# Altium PCB PCB1.PcbDoc
Units mm, origin at the board's own origin, x right, y up, seen from the top; angles counter-clockwise.
Board outline 76.58 x 73.41 mm, 2 copper layers (Top Layer, Bottom Layer), stack 1.471 mm thick; 10 components, 18 nets, 68 pads, 8 vias.
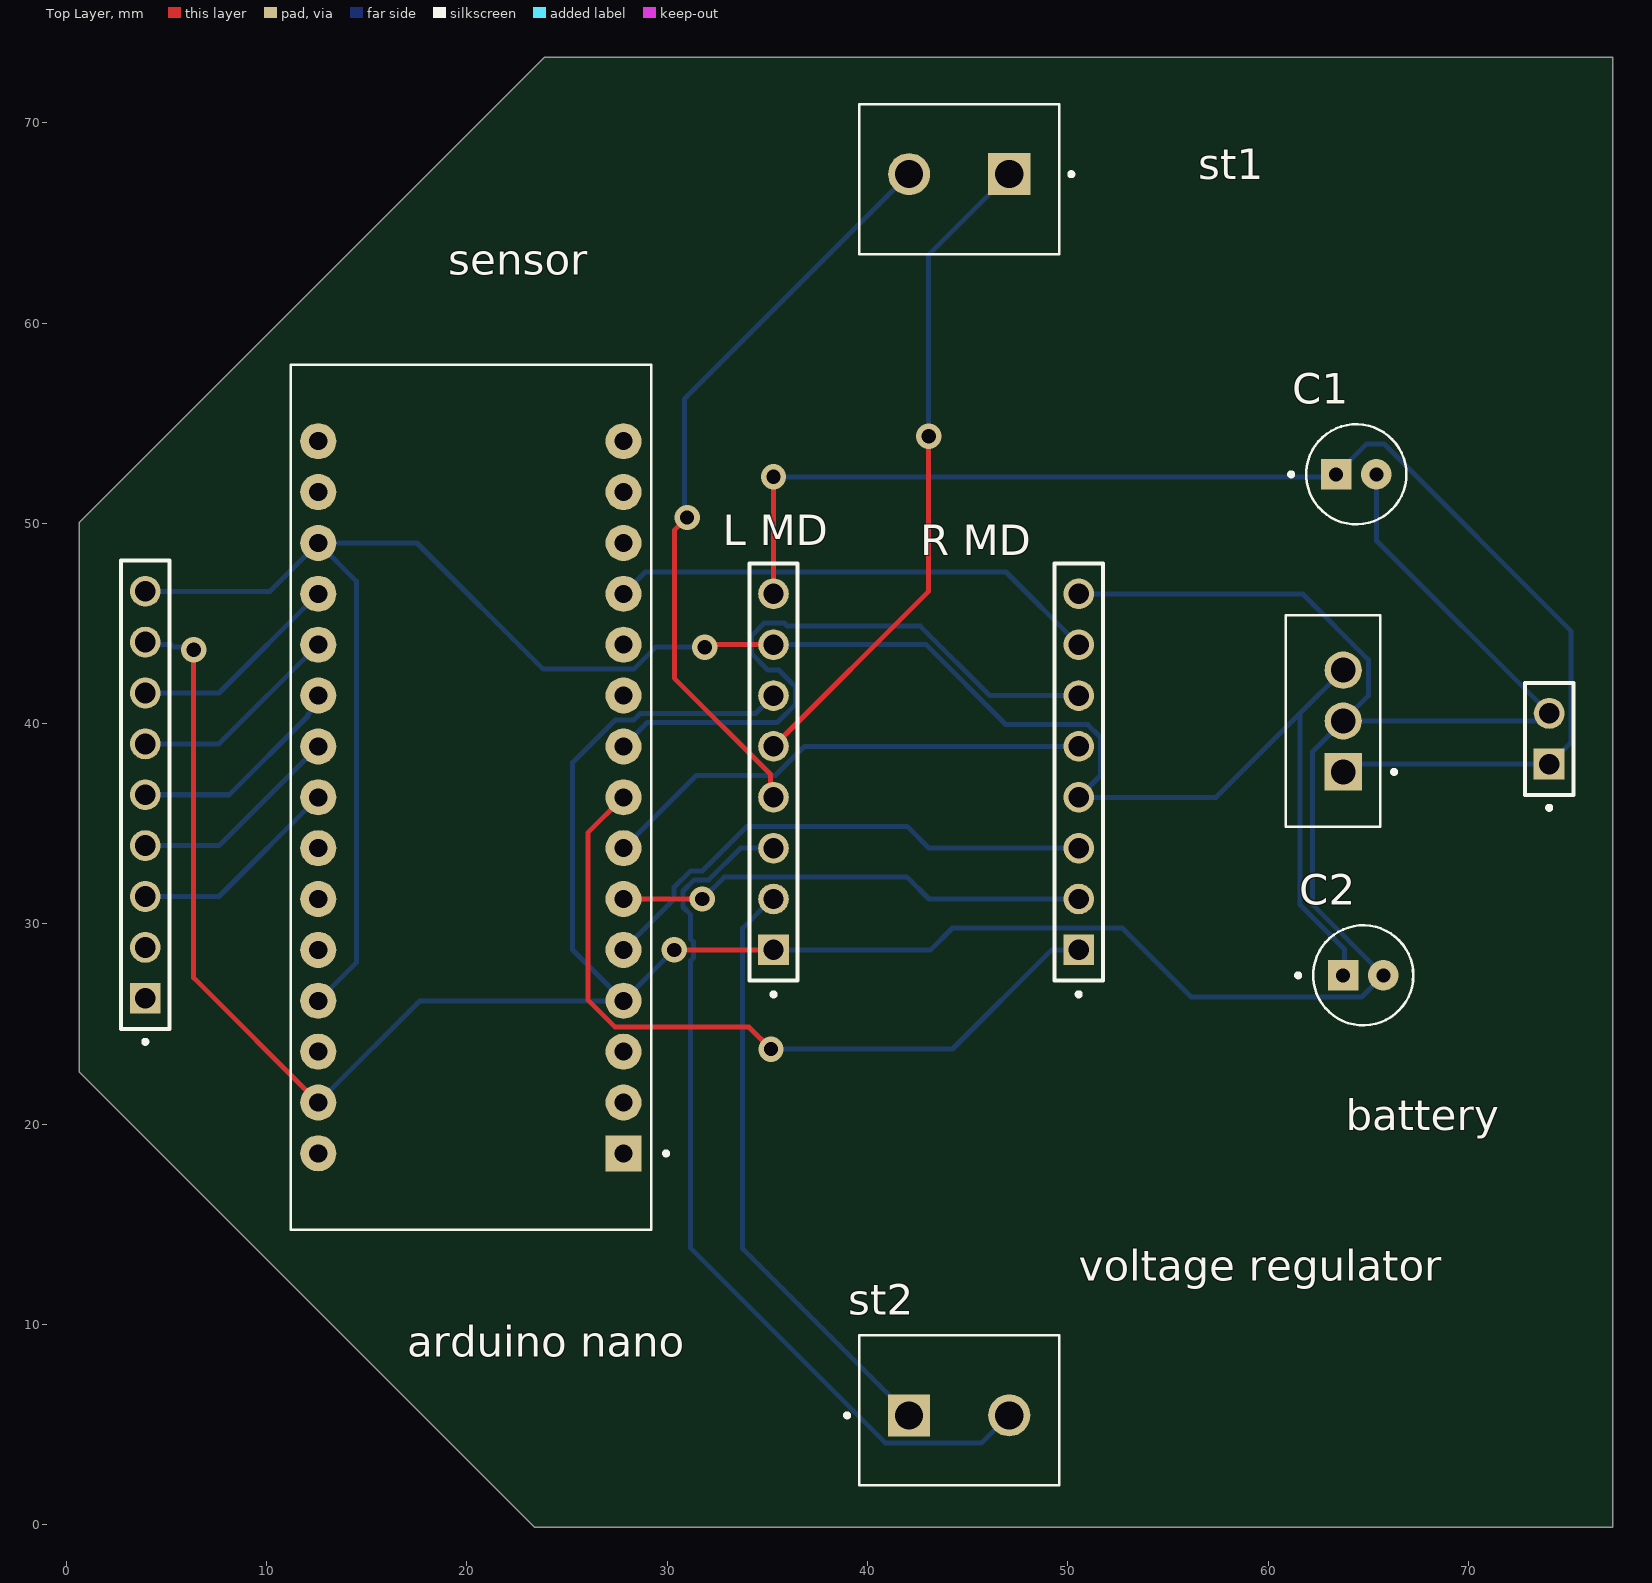
[diagram p0: Top Layer view]
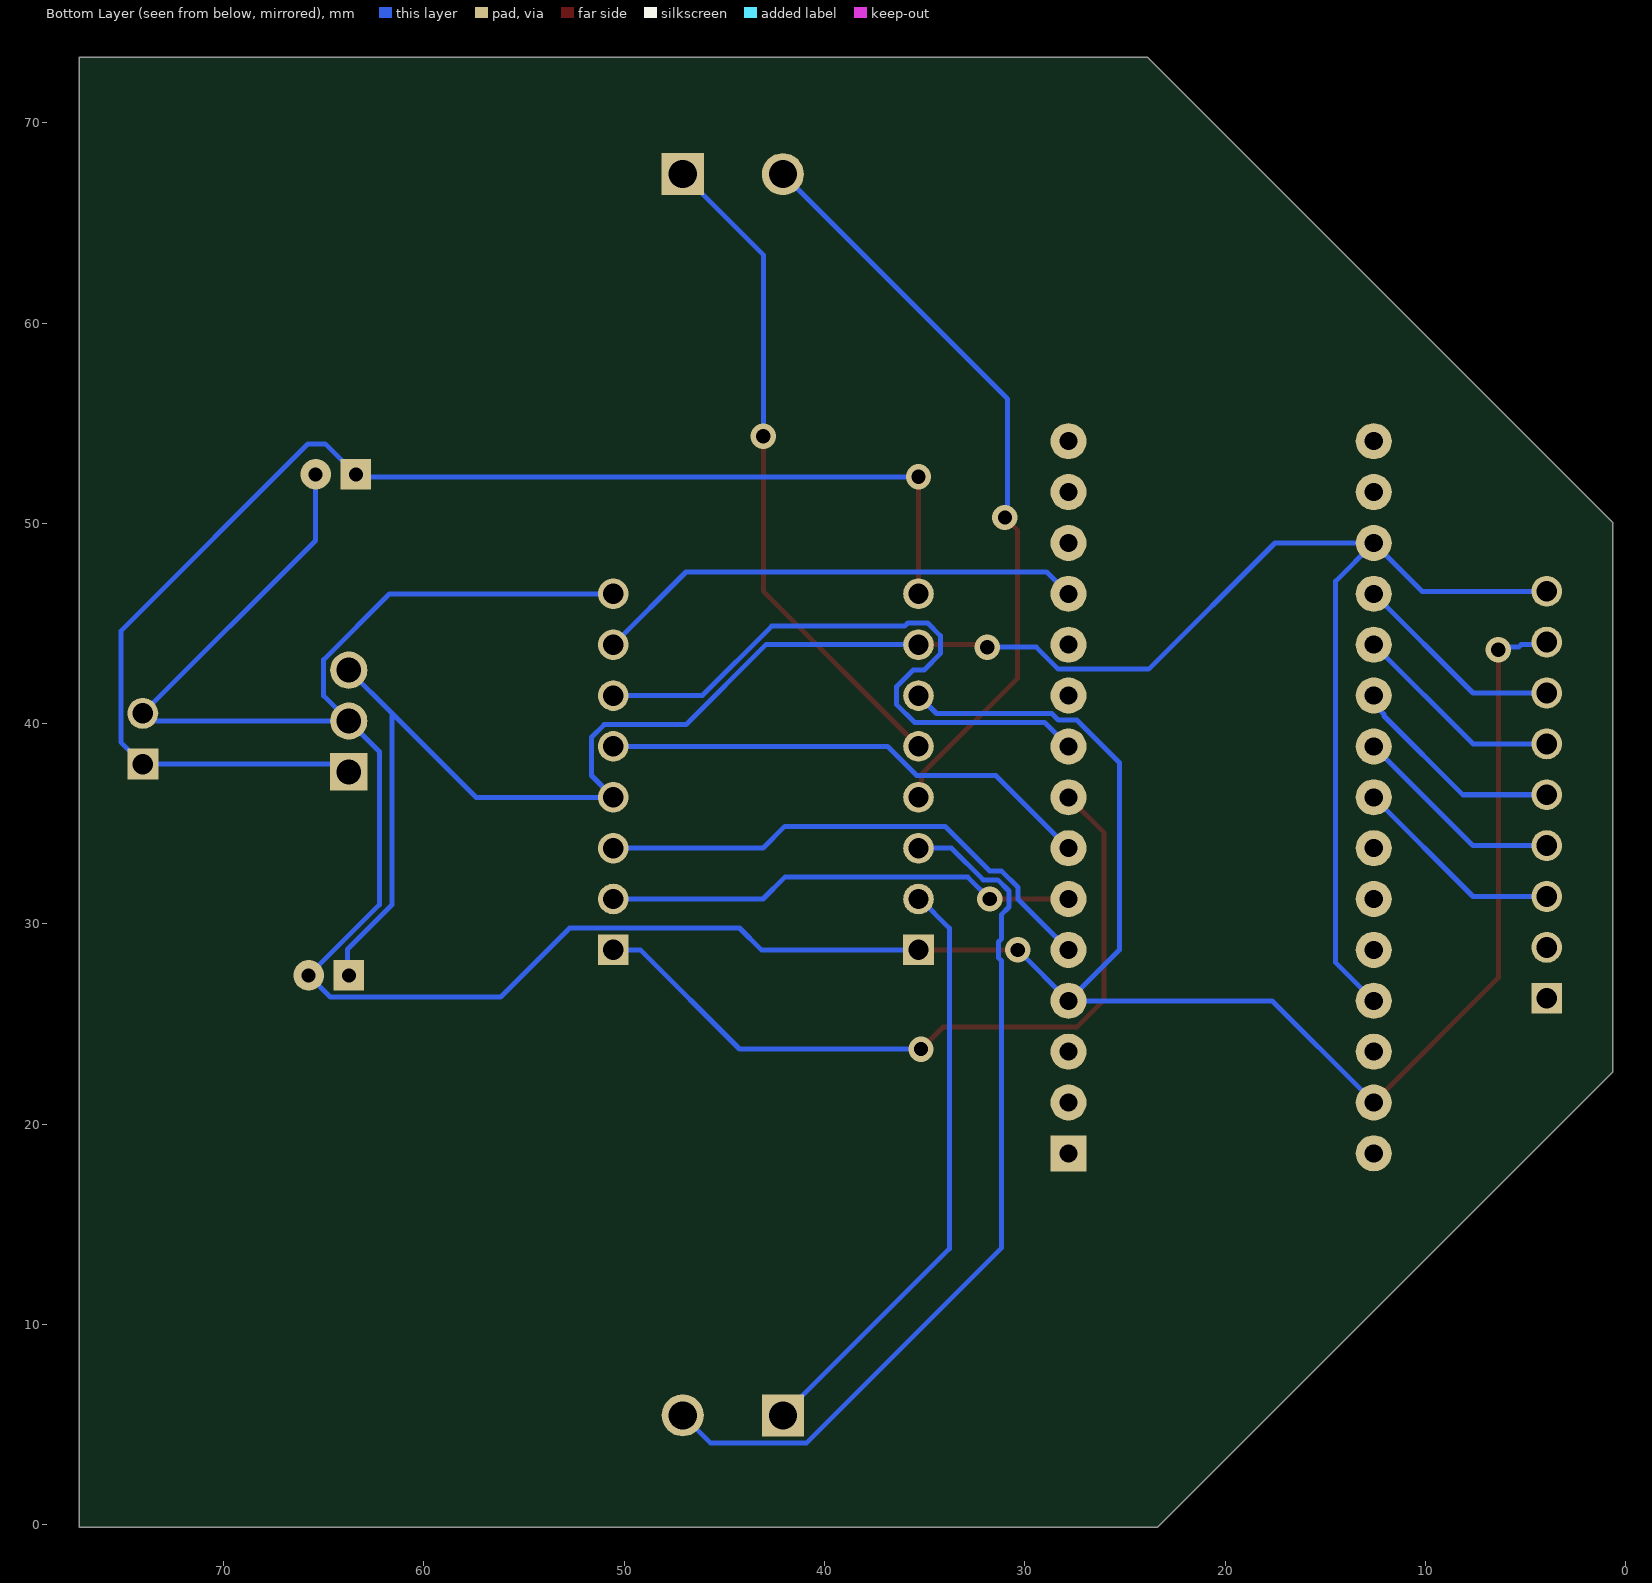
[diagram p1: Bottom Layer view, seen from below]
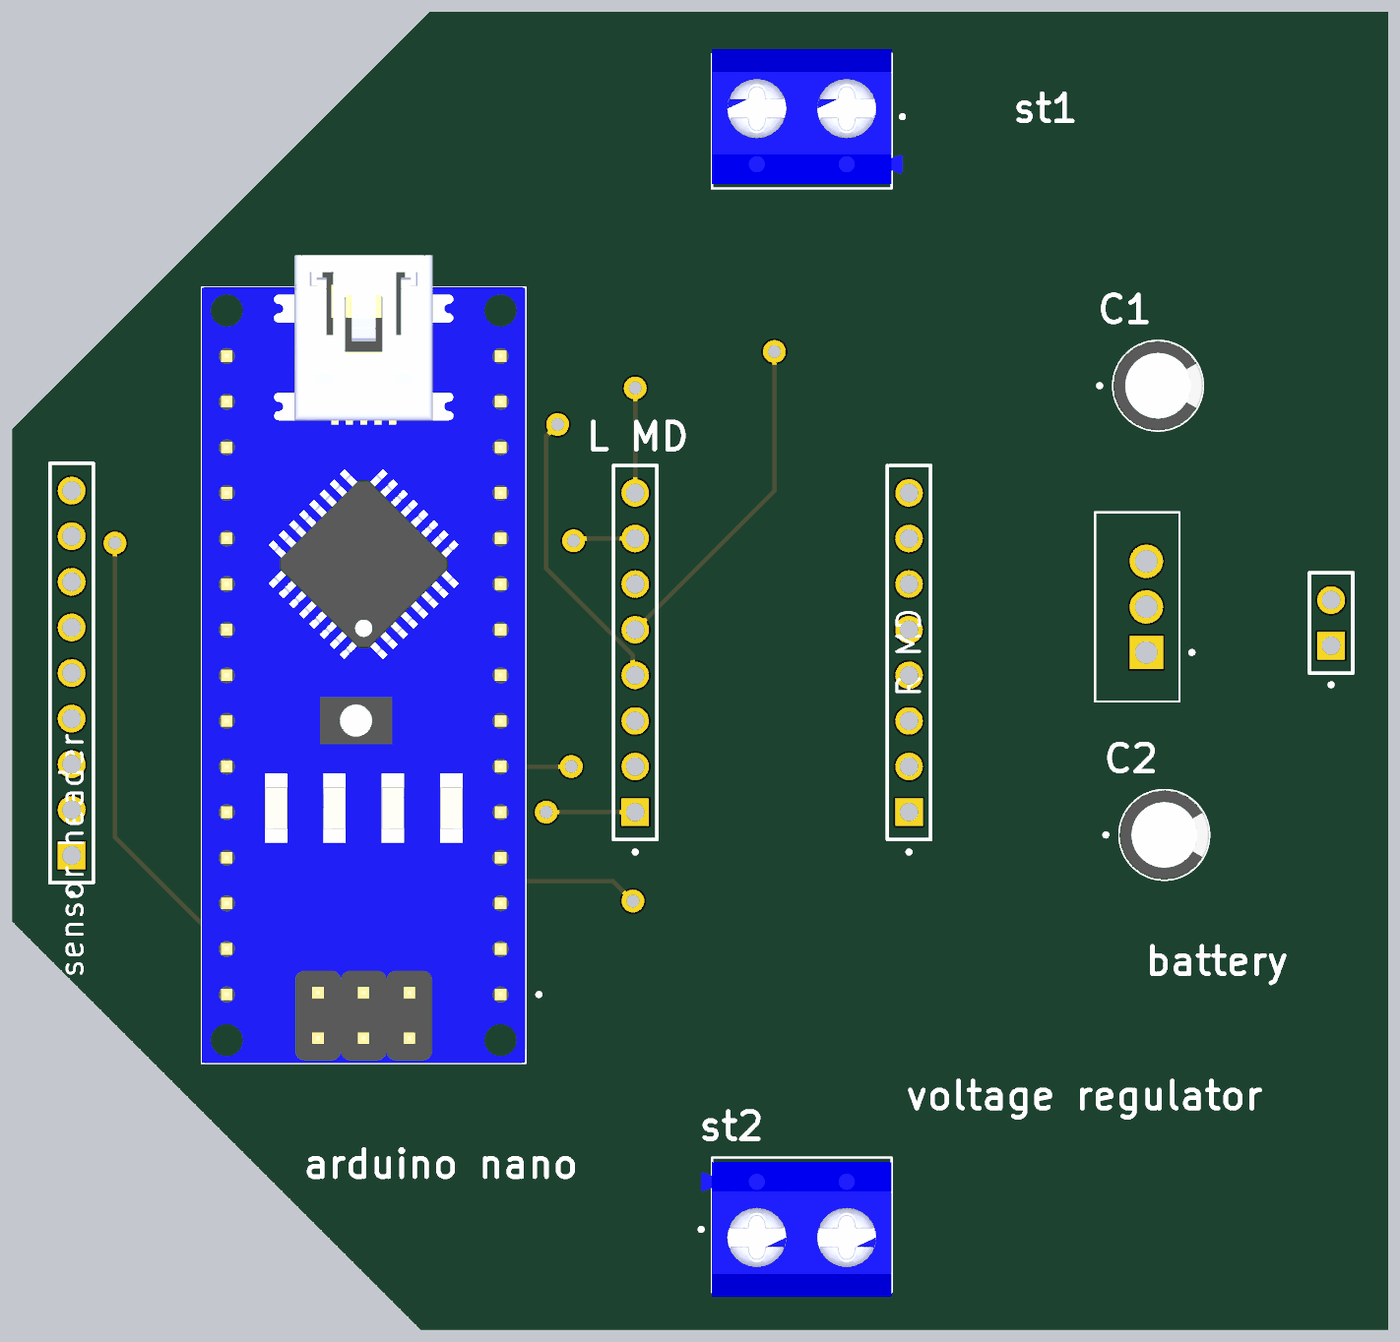
[diagram p2: 3D render of the assembled board from above, using the file's embedded part models]

## Layer stack, top to bottom
Top Solder: solder mask 0.0102, Solder Resist, Dk 3.5
Top Layer: signal copper 0.0356
Dielectric 1: dielectric 1.4, FR-4, Dk 4.8
Bottom Layer: signal copper 0.0356
Bottom Solder: solder mask 0.0102, Solder Resist, Dk 3.5

## Board outline
23.368,-0.127 77.216,-0.127 77.216,73.279 23.876,73.279 0.635,50.038 0.635,22.606

## Design rules (kind name [scope] priority, off if disabled: settings)
BoardOutlineClearance [All] p1: gap=1 ignorepadtopadclearanceinfootprint=FALSE
Clearance [All] p1: gap=0.2 ignorepadtopadclearanceinfootprint=FALSE
HoleSize [All] p1: absolutevalues=TRUE maxlimit=4 minlimit=0.2 maxpercent=80.000 minpercent=20.000
HoleToHoleClearance [All] p1: gap=0.5 allowstackedmicrovias=TRUE
MinimumAnnularRing [All] p1: minimumring=0.2
MinimumSolderMaskSliver [All] p1: minsoldermaskwidth=0.5
PolygonConnect [All] p1: connectstyle=Relief reliefconductorwidth=0.254 reliefentries=4 polygonreliefangle="90 Angle" airgapwidth=0.254
RoutingVias [All] p1: holewidth=0.711 width=1.27 viastyle="Through Hole" minholewidth=0.711 minwidth=1.27 maxholewidth=0.711 maxwidth=1.27
SolderMaskExpansion [All] p1: expansion=0.102 istentingtop=FALSE
SupplyNets "Schematic Supply Nets_2" [InNet('+5V')] p1: voltage=0.000
SupplyNets "Schematic Supply Nets_1" [InNet('VCC')] p2: voltage=0.000
SupplyNets "Schematic Supply Nets" [InNet('GND')] p3: voltage=0.000
Width [All] p1: maxlimit=0.5 minlimit=0.2 preferedwidth=0.25
27 further rules are at their usual default settings.

## Components (designator, comment, footprint, x,y, rotation, side; value= is the part's Value field where it differs from the comment)
"arduino nano" "ARDUINO_NANO" MODULE_ARDUINO_NANO 20.193,36.322 r180 top
battery "SSQ-102-03-F-S" new-SAMTEC_SSQ-102-03-F-S 74.041,39.243 r90 top
C1 "ECEA1HKS4R7" new-CAPPRD200W45D500H500 64.405,52.451 r0 top value="100 nF"
C2 "ECEA1HKS4R7" new-CAPPRD200W45D500H500 64.754,27.432 r0 top value=100nF
"L MD" "SSQ-108-X-X-S" SAMTEC_SSQ-108-X-X-S 35.306,37.592 r90 top
"R MD" "SSQ-108-X-X-S" SAMTEC_SSQ-108-X-X-S 50.546,37.592 r90 top
sensor "SSW-109-06-G-S" SAMTEC_SSW-109-06-G-S-new 3.937,26.289 r90 top (schematic designator "sensor header")
st1 "N20_DC MOTOR N" HANDSON_KF301-2P 44.577,67.437 r180 top (schematic designator "screw terminal 1")
st2 "N20_DC MOTOR N" HANDSON_KF301-2P 44.577,5.461 r0 top (schematic designator "screw terminal 2")
"voltage regulator" "LM7805CTG" TO254P1054X470X1955-3 63.754,40.132 r90 top

## Footprints (in the part's own frame and the unit in brackets; to place one, negate y for a bottom-side part, rotate by r counter-clockwise, add the part's x,y. Pads: shape width x height; smd on the part's side, far side on the other; paste and mask are expansions set on the pad)
HANDSON_KF301-2P [mm]
  rect 2.1x2.1 / inner round 2.1 / far side rect 2.1x2.1 hole 1.4: 1(-2.5,0)
  round 2.1 hole 1.4: 2(2.5,0)
  silkscreen extent -5.7,-3.5 5,4, body extent -5.6,-3.75 5,3.75, height 10
MODULE_ARDUINO_NANO [mm]
  rect 1.8x1.8 / inner round 1.8 / far side rect 1.8x1.8 hole 0.9: 1(-7.62,17.78)
  round 1.8 hole 0.9: 2(-7.62,15.24) 3(-7.62,12.7) 4(-7.62,10.16) 5(-7.62,7.62) 6(-7.62,5.08) 7(-7.62,2.54) 8(-7.62,0) 9(-7.62,-2.54) 10(-7.62,-5.08) 11(-7.62,-7.62) 12(-7.62,-10.16) 13(-7.62,-12.7) 14(-7.62,-15.24) 15(-7.62,-17.78) 16(7.62,-17.78) 17(7.62,-15.24) 18(7.62,-12.7) 19(7.62,-10.16) 20(7.62,-7.62) 21(7.62,-5.08) 22(7.62,-2.54) 23(7.62,0) 24(7.62,2.54) 25(7.62,5.08) 26(7.62,7.62) 27(7.62,10.16) 28(7.62,12.7) 29(7.62,15.24) 30(7.62,17.78)
  silkscreen extent -9.85,-21.6 9,21.6, body extent -9,-23.4 9,21.6, height 12.6
new-CAPPRD200W45D500H500 [mm]
  round 1.533 hole 0.7: N(1,0)
  rect 1.533x1.533 hole 0.7: P(-1,0)
  silkscreen extent -3.35,-2.5 2.5,2.5, body extent -2.5,-2.5 2.5,2.5, height 5
new-SAMTEC_SSQ-102-03-F-S [mm]
  rect 1.548x1.548 hole 1.02: 01(-1.27,0)
  round 1.548 hole 1.02: 02(1.27,0)
  silkscreen extent -3.54,-1.2 2.8,1.2
SAMTEC_SSQ-108-X-X-S [mm]
  rect 1.53x1.53 hole 1.02: 01(-8.89,0)
  round 1.53 hole 1.02: 02(-6.35,0) 03(-3.81,0) 04(-1.27,0) 05(1.27,0) 06(3.81,0) 07(6.35,0) 08(8.89,0)
  silkscreen extent -11.21,-1.2 10.42,1.2
SAMTEC_SSW-109-06-G-S-new [mm]
  rect 1.542x1.542 hole 1.04: 01(0,0)
  round 1.542 hole 1.04: 02(2.54,0) 03(5.08,0) 04(7.62,0) 05(10.16,0) 06(12.7,0) 07(15.24,0) 08(17.78,0) 09(20.32,0)
  silkscreen extent -2.27,-1.21 21.85,1.21
TO254P1054X470X1955-3 [mm]
  rect 1.86x1.86 / inner round 1.86 / far side rect 1.86x1.86 hole 1.24: 1(-2.54,0)
  round 1.86 hole 1.24: 2(0,0) 3(2.54,0)
  silkscreen extent -5.27,-2.64 5.27,2.86

## Part data
"arduino nano": "Small, complete, and breadboard-friendly board based on the ATmega328 (Arduino Nano 3.x)", Package="Non-Standard Arduino", Check_prices=https://www.snapeda.com/parts/Arduino%20Nano/Arduino/view-part/?ref=eda, MF=Arduino, MP="Arduino Nano", SnapEDA_Link=https://www.snapeda.com/parts/Arduino%20Nano/Arduino/view-part/?ref=snap
battery: "Conn Socket Strip SKT 2 POS 2.54mm Solder ST Top Entry Thru-Hole Bulk", Package=None, Check_prices=https://www.snapeda.com/parts/SSQ-102-03-F-S/Samtec/view-part/?ref=eda, MF=Samtec, MP=SSQ-102-03-F-S, SnapEDA_Link=https://www.snapeda.com/parts/SSQ-102-03-F-S/Samtec/view-part/?ref=snap
C1 C2: "Capacitor; Aluminum Electrolytic; Cap 4.7uF; Vol-Rtg 50V; Radial; Ks; Height 5mm", Package="RADIAL-2 Panasonic", Availability="In Stock", Check_prices=https://www.snapeda.com/parts/ECE-A1HKS4R7/Panasonic/view-part/2302906/?ref=eda, MF=Panasonic, MP=ECE-A1HKS4R7, Price=None, SnapEDA_Link=https://www.snapeda.com/parts/ECE-A1HKS4R7/Panasonic/view-part/2302906/?ref=snap
"L MD" "R MD": "8 Position Receptacle Connector Through Hole, Right Angle", Package=None, Availability=Unavailable, MF="Samtec Inc.", MP=SSQ-108-X-X-S, Price=None
sensor: Package=None, Availability=Unavailable, MF=Samtec, MP=SSW-109-06-G-S, Price=None
"voltage regulator": JLCPCB Part Class="Extended Part", LCSC Part Name=三端1A正电源稳压电路, Manufacturer=HGC(深圳汉芯), Operating Temperature=0℃~+85℃, Output Current=1A, Output Voltage=5V, Power Supply Rejection Ratio (PSRR)=73dB@(120Hz), Voltage - Supply=35V, Add into BOM=yes, Convert to PCB=yes, Datasheet=https://atta.szlcsc.com/upload/public/pdf/source/20220425/1AD29514C6CC449CC18E73451741492B.pdf, Device=LM7805CTG, Manufacturer Part=LM7805CTG, Number of Outputs=1, Output Configuration="Positive electrode", Output Type=Fixed, Supplier=LCSC, Supplier Footprint=TO-220, Supplier Part=C2977083, Symbol=LM7805CTG
st1 st2: 3DModel="N20 Motor and Wheel", Add into BOM=yes, Convert to PCB=yes, Device="N20_DC MOTOR N", Symbol="N20_DC MOTOR N"

## Via types
v1: diameter 1.27, hole 0.711, Top Layer to Bottom Layer, 8 vias

## Nets (pads, with @x,y where several pads share a name; then routed paths per layer and width w, separated by ;. In a path a pad name is that pad's centre, name@x,y a point inside that pad or via, vN(x,y) a via of type N, cw(c..) or ccw(c..) an arc to the next point about the centre after c; other vN are vias at no path point)
+5V: "arduino nano.18" "arduino nano.27" "L MD.07" "R MD.04" "voltage regulator.3" C2.P sensor.09 | length 111.6
  Top Layer w0.25: v1(31.877,43.815) 32.004,43.942 35.306,43.942
  Bottom Layer w0.25: sensor.09 4.064,46.482 4.191,46.609 10.16,46.609 12.573,49.022 ; 12.573,26.162 14.478,28.067 14.478,47.117 12.573,49.022 ; v1(31.877,43.815) 29.418,43.815 28.32,42.717 23.809,42.717 17.504,49.022 12.573,49.022 ; 35.306,43.942 42.926,43.942 46.916,39.952 50.997,39.952 51.636,39.313 51.636,37.412 50.546,36.322 57.404,36.322 61.595,40.513 ; C2.P 63.818,27.496 63.818,28.732 61.595,30.955 61.595,40.513 ; 63.754,42.672 61.595,40.513
A01: "L MD.05" st1.1 | length 33.5
  Top Layer w0.25: 35.306,38.862 43.053,46.609 v1(43.053,54.356)
  Bottom Layer w0.25: v1(43.053,54.356) 43.053,63.413 st1.1
A02: "L MD.04" st1.2 | length 38.4
  Top Layer w0.25: v1(30.988,50.292) 30.353,49.657 30.353,42.274 35.165,37.462 35.165,36.463 35.306,36.322
  Bottom Layer w0.25: v1(30.988,50.292) 30.861,50.419 30.861,56.221 41.609,66.969 42.077,66.969 st1.2
AIN1: "arduino nano.5" "R MD.03" | length 26.1
  Bottom Layer w0.25: 27.813,28.702 30.34,31.229 30.34,31.826 31.166,32.652 31.763,32.652 33.983,34.872 41.982,34.872 43.072,33.782 50.546,33.782
AIN2: "arduino nano.6" "R MD.02" | length 23.6
  Top Layer w0.25: 27.813,31.242 v1(31.75,31.242)
  Bottom Layer w0.25: v1(31.75,31.242) 32.84,32.332 41.982,32.332 43.072,31.242 50.546,31.242
B01: "L MD.02" st2.1 | length 29.9
  Bottom Layer w0.25: 35.306,31.242 35.22,31.242 33.766,29.788 33.766,13.772 st2.1
B02: "L MD.03" st2.2 | length 44
  Bottom Layer w0.25: 35.306,33.782 33.654,33.782 32.074,32.202 31.352,32.202 30.79,31.64 30.79,30.844 31.173,30.461 31.173,29.24 31.313,29.1 31.313,28.304 31.173,28.164 31.173,13.805 40.892,4.086 45.702,4.086 st2.2
BIN1: "arduino nano.7" "R MD.05" | length 24.8
  Bottom Layer w0.25: 27.813,33.782 31.443,37.412 35.397,37.412 36.847,38.862 50.546,38.862
BIN2: "arduino nano.9" "R MD.06" | length 32.2
  Bottom Layer w0.25: 27.813,38.862 29.006,40.055 35.5,40.055 36.396,40.951 36.396,41.853 35.577,42.672 35.035,42.672 34.216,43.491 34.216,44.393 34.855,45.032 35.828,45.032 35.994,44.865 42.639,44.865 46.102,41.402 50.546,41.402
GND: "arduino nano.4" "arduino nano.29" "L MD.01" "L MD.06" "R MD.08" "voltage regulator.2" battery.02 C1.N C2.N sensor.08 | length 171.4
  Top Layer w0.25: v1(6.35,43.688) 6.35,27.305 12.573,21.082 ; v1(30.353,28.702) 35.306,28.702
  Bottom Layer w0.25: sensor.08 4.064,43.942 5.215,43.942 5.34,43.817 6.221,43.817 v1(6.35,43.688) ; 12.573,21.082 12.573,21.463 12.954,21.463 17.653,26.162 27.813,26.162 ; v1(30.353,28.702) 27.813,26.162 ; 35.306,28.702 43.151,28.702 44.241,29.792 52.722,29.792 56.174,26.341 64.663,26.341 C2.N 62.23,30.956 62.23,38.608 63.754,40.132 ; 35.56,41.402 35.306,41.402 34.409,40.505 28.648,40.505 28.32,40.177 27.396,40.177 25.273,38.054 25.273,28.702 27.813,26.162 ; 50.546,46.482 61.719,46.482 65.009,43.192 65.009,41.387 63.754,40.132 ; C1.N 65.405,49.149 battery.02 73.738,40.513 73.357,40.132 63.754,40.132
"Netarduino nano_19": "arduino nano.19" sensor.07 | length 10.7
  Bottom Layer w0.25: sensor.07 7.62,41.529 12.573,46.482
"Netarduino nano_20": "arduino nano.20" sensor.06 | length 10.7
  Bottom Layer w0.25: sensor.06 7.62,38.989 12.573,43.942
"Netarduino nano_21": "arduino nano.21" sensor.05 | length 11
  Bottom Layer w0.25: sensor.05 8.128,36.449 12.065,40.386 12.065,40.475 12.573,40.983 12.573,41.402
"Netarduino nano_22": "arduino nano.22" sensor.04 | length 10.7
  Bottom Layer w0.25: sensor.04 7.62,33.909 12.573,38.862
"Netarduino nano_23": "arduino nano.23" sensor.03 | length 10.7
  Bottom Layer w0.25: sensor.03 7.62,31.369 12.573,36.322
PWMA: "arduino nano.8" "R MD.01" | length 38.4
  Top Layer w0.25: 27.813,36.322 26.035,34.544 26.035,26.208 27.396,24.847 34.081,24.847 v1(35.179,23.749)
  Bottom Layer w0.25: v1(35.179,23.749) 44.24,23.749 49.193,28.702 50.546,28.702
PWMB: "arduino nano.12" "R MD.07" | length 24.7
  Bottom Layer w0.25: 27.813,46.482 28.903,47.572 46.916,47.572 50.546,43.942
VCC: "L MD.08" "voltage regulator.1" battery.01 C1.P | length 68
  Top Layer w0.25: 35.306,46.482 v1(35.306,52.324)
  Bottom Layer w0.25: v1(35.306,52.324) 63.278,52.324 C1.P 64.929,53.975 65.786,53.975 75.14,44.621 75.14,39.072 battery.01 64.135,37.973 63.754,37.592 63.754,37.846
pads on no net: "arduino nano.1" "arduino nano.2" "arduino nano.3" "arduino nano.10" "arduino nano.11" "arduino nano.13" "arduino nano.14" "arduino nano.15" "arduino nano.16" "arduino nano.17" "arduino nano.24" "arduino nano.25" "arduino nano.26" "arduino nano.28" "arduino nano.30" sensor.01 sensor.02